# Altium PCB FDTI_USB_PCB.PcbDoc (part 2 of 2)
Units mil, origin at the board's own origin, x right, y up, seen from the top; angles counter-clockwise.
Board outline 5600 x 4000 mil, 4 copper layers (Top Layer, Plane(Gnd), Plane(PWR), Bottom Layer), stack 23.756 mil thick; 166 components, 158 nets, 411 pads, 530 vias.
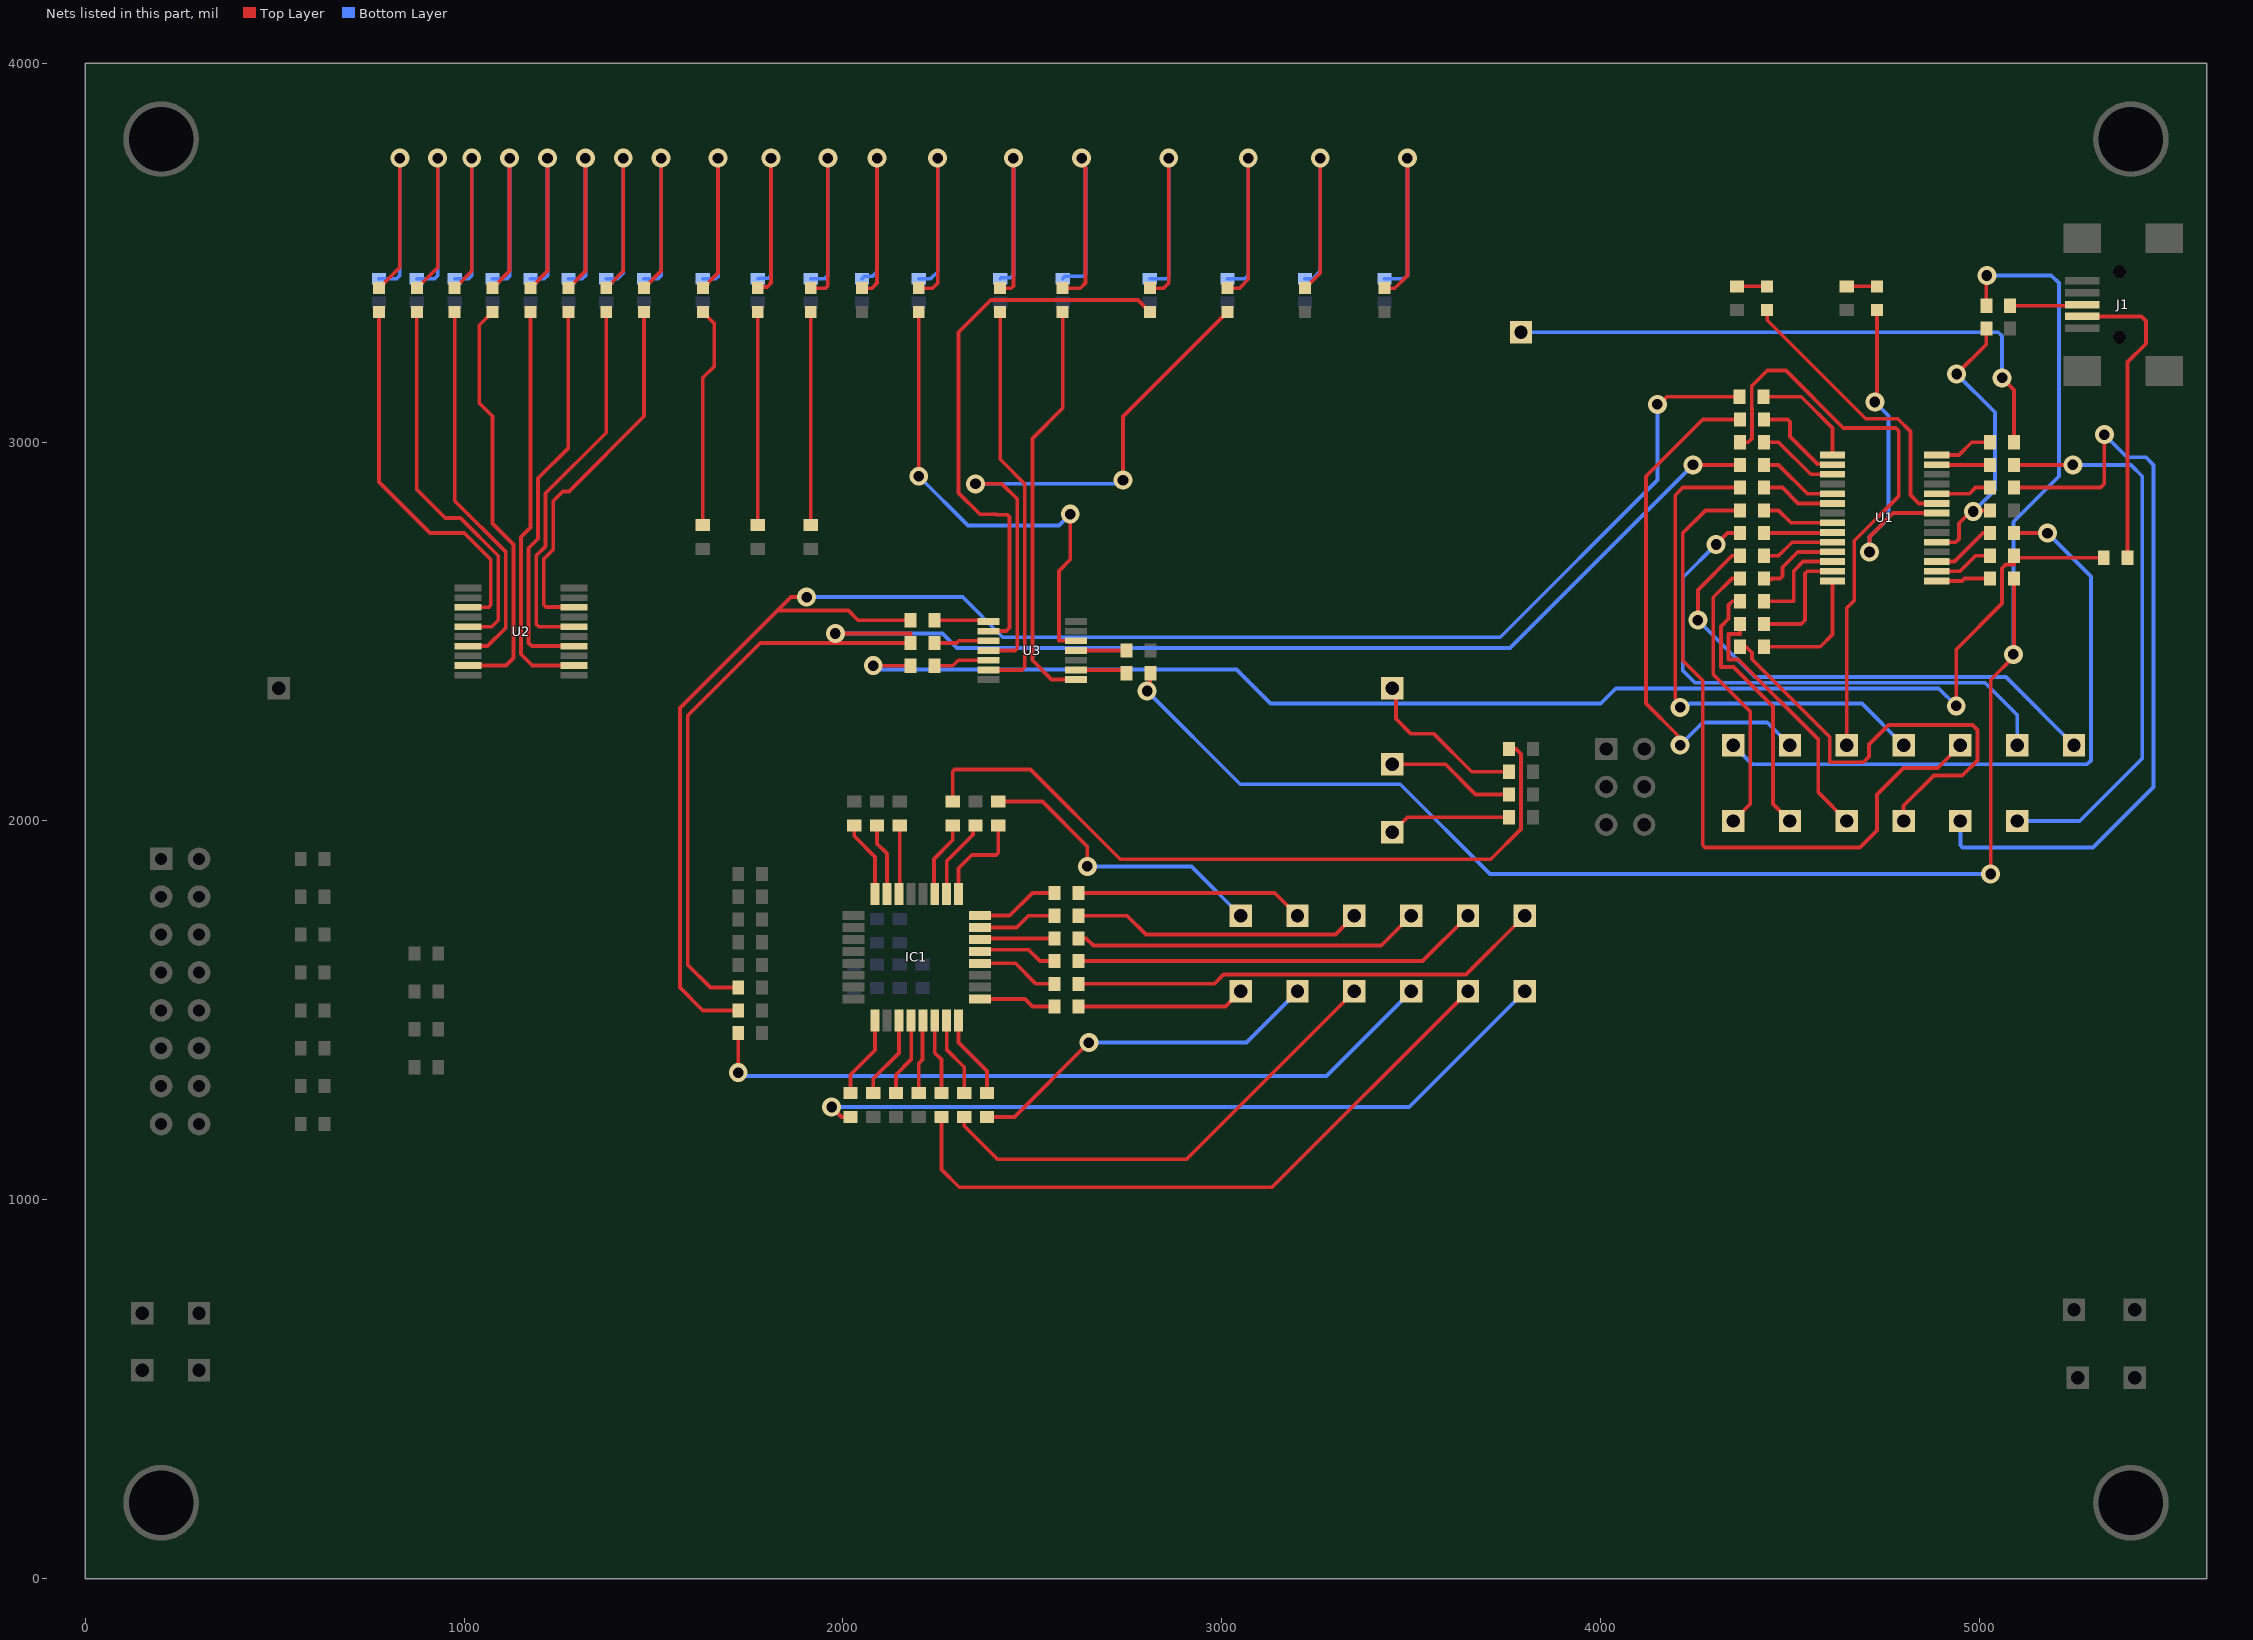
[diagram p4: the nets of this part, all layers, seen from the top]

## Via types
v1: diameter 50, hole 28, Top Layer to Bottom Layer, 530 vias

## Nets (pads, with @x,y where several pads share a name; then routed paths per layer and width w, separated by ;. In a path a pad name is that pad's centre, name@x,y a point inside that pad or via, vN(x,y) a via of type N, cw(c..) or ccw(c..) an arc to the next point about the centre after c; other vN are vias at no path point) (continued)
NetIC1_9: IC1.9 R40.2 | length 218.5
  Top Layer w10: R40.2@2020,1281.5 2020,1330 2084.76,1394.76 IC1.9@2084.76,1473.15
NetIC1_11: IC1.11 R43.1 | length 219.7
  Top Layer w10: R43.1@2080,1281.5 2080,1320 2147.76,1387.76 IC1.11@2147.76,1473.15
NetIC1_12: IC1.12 R42.1 | length 208.5
  Top Layer w10: R42.1@2140,1281.5 2140,1330 2180,1370 2180,1472.4 IC1.12@2179.25,1473.15
NetIC1_13: IC1.13 R41.1 | length 196.1
  Top Layer w10: R41.1@2200,1281.5 2200,1360 2210,1370 2210,1472.4 IC1.13@2210.75,1473.15
NetIC1_14: IC1.14 R39.1 | length 199
  Top Layer w10: IC1.14@2242.24,1473.15 2242.24,1387.76 2260,1370 R39.1@2260,1281.5
NetIC1_15: IC1.15 R37.1 | length 210.8
  Top Layer w10: IC1.15@2273.74,1473.15 2273.74,1396.26 2320,1350 R37.1@2320,1281.5
NetIC1_16: IC1.16 R35.1 | length 222.6
  Top Layer w10: IC1.16@2305.24,1473.15 2305.24,1414.76 2380,1340 R35.1@2380,1281.5
NetIC1_17: IC1.17 R33.1 | length 204.8
  Top Layer w10: IC1.17@2361.85,1529.76 2480.24,1529.76 2500,1510 R33.1@2558.5,1510
NetIC1_20: IC1.20 R32.1 | length 219.1
  Top Layer w10: IC1.20@2361.85,1624.25 2455.75,1624.25 2510,1570 R32.1@2558.5,1570
NetIC1_21: IC1.21 R30.1 | length 210.8
  Top Layer w10: IC1.21@2361.85,1655.75 2366.1,1660 2490,1660 2520,1630 R30.1@2558.5,1630
NetIC1_22: IC1.22 R28.1 | length 197.8
  Top Layer w10: IC1.22@2361.85,1687.24 2364.61,1690 R28.1@2558.5,1690
NetIC1_23: IC1.23 R26.1 | length 209.6
  Top Layer w10: IC1.23@2361.85,1718.74 2458.74,1718.74 2490,1750 R26.1@2558.5,1750
NetIC1_24: IC1.24 R24.1 | length 221.4
  Top Layer w10: IC1.24@2361.85,1750.24 2440.24,1750.24 2500,1810 R24.1@2558.5,1810
NetIC1_25: IC1.25 R22.1 | length 262.6
  Top Layer w10: IC1.25@2305.24,1806.85 2305.24,1875.24 2340,1910 2404.14,1910 2410,1915.86 R22.1@2410,1988.5
NetIC1_26: IC1.26 R20.1 | length 213.2
  Top Layer w10: IC1.26@2273.74,1806.85 2273.74,1893.74 2343.61,1963.61 2343.61,1982.12 R20.1@2350,1988.5
NetIC1_27: IC1.27 R18.1 | length 203.3
  Top Layer w10: IC1.27@2242.24,1806.85 2240,1809.09 2240,1900 2290,1950 R18.1@2290,1988.5
NetIC1_30: IC1.30 R17.2 | length 182.6
  Top Layer w10: IC1.30@2147.76,1806.85 2150,1809.09 R17.2@2150,1988.5
NetIC1_31: IC1.31 R19.2 | length 192.5
  Top Layer w10: R19.2@2090,1988.5 2090,1940 2116.26,1913.74 IC1.31@2116.26,1806.85
NetIC1_32: IC1.32 R21.2 | length 204.3
  Top Layer w10: R21.2@2030,1988.5 2030,1960 2084.76,1905.24 IC1.32@2084.76,1806.85
NetJ1_2: J1.2 R51.1 | length 813.4
  Top Layer w10: J1.2@5271.57,3331.89 5428.11,3331.89 5440,3320 5440,3260 5391.5,3211.5 R51.1@5391.5,2700
NetJ1_3: J1.3 R53.1 | length 191.5
  Top Layer w10: R53.1@5081.5,3360 5268.19,3360 J1.3@5271.57,3363.39
NetLED1_1: LED1.1 U1.23 | length 773.1
  Top Layer w10: LED1.1@4440,3348.5 4440,3322 4700,3062 4784.55,3062 4818,3028.55 4818,2860.39 4840,2838.39 U1.23@4887.8,2838.39
NetLED1_2: LED1.2 R44.1 | length 80
  Top Layer w10: R44.1@4360,3411.5 LED1.2@4440,3411.5
NetLED2_1: LED2.1 U1.22 | length 920.4
  Top Layer w10: v1(4710,2710) 4710,2750 4772.8,2812.8 U1.22@4887.8,2812.8 ; v1(4724,3106) 4730,3112 LED2.1@4730,3348.5
  Bottom Layer w10: v1(4710,2710) 4710,2750 4760,2800 4760,3070 v1(4724,3106)
NetLED2_2: LED2.2 R45.1 | length 80
  Top Layer w10: R45.1@4650,3411.5 LED2.2@4730,3411.5
NetLED3_1: LED3.1 R88.2 | length 586.9
  Top Layer w10: R88.2@1630,2781.5 1630,3170 1660,3200 1660,3313.5 LED3.1@1630,3343.5
NetLED3_2: LED3.2 R68.1 | length 715.1
  Top Layer w10: LED3.2@1630,3406.5 1670,3446.5 v1(1670,3750)
  Bottom Layer w10: R68.1@1630,3431.5 1664.14,3431.5 1670,3437.35 v1(1670,3750)
NetLED4_1: LED4.1 R90.2 | length 562
  Top Layer w10: R90.2@1775,2781.5 LED4.1@1775,3343.5
NetLED4_2: LED4.2 R69.2 | length 719.1
  Top Layer w10: LED4.2@1775,3406.5 1778.39,3409.89 1799.89,3409.89 1810,3420 v1(1810,3750)
  Bottom Layer w10: R69.2@1775,3431.5 1776.35,3432.84 1802.84,3432.84 1810,3440 v1(1810,3750)
NetLED5_1: LED5.1 R92.2 | length 562
  Top Layer w10: R92.2@1915,2781.5 1915,3048.5 LED5.1@1915,3343.5
NetLED5_2: LED5.2 R70.1 | length 743.6
  Top Layer w10: LED5.2@1915,3406.5 1954.14,3406.5 1960,3412.35 v1(1960,3750)
  Bottom Layer w10: R70.1@1915,3431.5 1951.5,3431.5 1960,3440 v1(1960,3750)
NetLED6_1: LED6.1 U3.2 | length 1490.4
  Top Layer w10: U3.2@2384.33,2501.18 2431.18,2501.18 2440,2510 2440,2798.61 ; 2436.91,2805.83 cw(c2430,2798.61) 2437.25,2805.49 ; 2440,2798.66 cw(c2430,2798.61) 2440,2798.61 ; LED6.1@2810,3343.5 2778.5,3375 2390,3375 2305,3290 2305,2865.98 2361,2809.98 2380.61,2809.98 ccw(c2459.18,4753.94) 2430.17,2808.6 cw(c2430,2798.61) 2430.33,2808.6 2434.14,2808.48 2437.25,2805.49 ; 2437.25,2805.49 2439.98,2802.65 2440,2798.61
NetLED6_2: LED6.2 R71.1 | length 751.5
  Top Layer w10: LED6.2@2810,3406.5 2846.5,3406.5 2860,3420 v1(2860,3750)
  Bottom Layer w10: R71.1@2810,3431.5 2855.64,3431.5 2860,3435.86 v1(2860,3750)
NetLED7_1: LED7.1 U3.4 | length 1535.7
  Top Layer w10: v1(2350,2890) 2420,2890 2460,2850 2460,2455.86 2454.14,2450 U3.4@2384.33,2450 ; v1(2739.18,2900) 2739.18,3067.68 LED7.1@3015,3343.5
  Bottom Layer w10: v1(2350,2890) v1@2729.18,2890
NetLED7_2: LED7.2 R72.1 | length 763.3
  Top Layer w10: LED7.2@3015,3406.5 3046.5,3406.5 3070,3430 v1(3070,3750)
  Bottom Layer w10: R72.1@3015,3431.5 3061.5,3431.5 3070,3440 v1@3070,3760
NetLED8_1: LED8.1 U3.6 | length 1063.2
  Top Layer w10: U3.6@2384.33,2398.82 2472.96,2398.82 2480,2405.86 2480,2890 2415,2955 LED8.1@2415,3343.5
NetLED8_2: LED8.2 R73.1 | length 732.7
  Top Layer w10: LED8.2@2415,3406.5 2444.14,3406.5 2450,3412.35 v1(2450,3750)
  Bottom Layer w10: R73.1@2415,3431.5 2417.84,3434.34 2442.84,3434.34 2450,3441.5 v1@2450,3760
NetLED9_1: LED9.1 U3.8 | length 1089.3
  Top Layer w10: LED9.1@2580,3343.5 2580,3090 2500,3010 2500,2424.08 2550.85,2373.23 U3.8@2615.67,2373.23
NetLED9_2: LED9.2 R74.1 | length 775.2
  Top Layer w10: LED9.2@2580,3406.5 2626.5,3406.5 2640,3420 2640,3724.14 2637.65,3726.49 2637.65,3742.35 v1(2630,3750)
  Bottom Layer w10: R74.1@2580,3431.5 2586.35,3437.84 2634.14,3437.84 2640,3443.7 2640,3724.14 2637.65,3726.49 2637.65,3742.35 v1(2630,3750)
NetLED10_2: LED10.2 R75.1 | length 723.3
  Top Layer w10: LED10.2@2050,3406.5 2076.5,3406.5 2090,3420 v1(2090,3750)
  Bottom Layer w10: R75.1@2050,3431.5 2056.35,3437.84 2077.84,3437.84 2090,3450 v1(2090,3750)
NetLED11_1: LED11.1 U2.18 | length 974.8
  Top Layer w10: U2.18@1289.76,2563.98 1288.93,2564.81 1215.86,2564.81 1210,2570.67 1210,2691.72 1235,2716.72 1235,2845 1260,2870 1276.5,2870 1475,3068.5 LED11.1@1475,3343.5
NetLED11_2: LED11.2 R79.1 | length 720.7
  Top Layer w10: LED11.2@1475,3406.5 1520,3451.5 v1(1520,3750)
  Bottom Layer w10: R79.1@1475,3431.5 1511.5,3431.5 1520,3440 v1(1520,3750)
NetLED12_1: LED12.1 U2.16 | length 1002.9
  Top Layer w10: U2.16@1289.76,2512.8 1197.2,2512.8 1190,2520 1190,2700 1215,2725 1215,2865 1375,3025 LED12.1@1375,3343.5
NetLED12_2: LED12.2 R80.1 | length 717.2
  Top Layer w10: LED12.2@1375,3406.5 1420,3451.5 v1(1420,3750)
  Bottom Layer w10: R80.1@1375,3431.5 1405.64,3431.5 1420,3445.86 v1(1420,3750)
NetLED13_1: LED13.1 U2.14 | length 1040.2
  Top Layer w10: LED13.1@1275,3343.5 1275,3068.5 1275,2985 1195,2905 1195,2745 1170,2720 1170,2470 1178.39,2461.61 U2.14@1289.76,2461.61
NetLED13_2: LED13.2 R81.1 | length 720.7
  Top Layer w10: LED13.2@1275,3406.5 1320,3451.5 v1(1320,3750)
  Bottom Layer w10: R81.1@1275,3431.5 1311.5,3431.5 1320,3440 v1(1320,3750)
NetLED14_1: LED14.1 U2.12 | length 1065.9
  Top Layer w10: LED14.1@1175,3343.5 1175,3068.5 1175,2775 1150,2750 1150,2440 1179.57,2410.43 U2.12@1289.76,2410.43
NetLED14_2: LED14.2 R82.1 | length 720.7
  Top Layer w10: LED14.2@1175,3406.5 1220,3451.5 v1(1220,3750)
  Bottom Layer w10: R82.1@1175,3431.5 1211.5,3431.5 1220,3440 v1(1220,3750)
NetLED15_1: LED15.1 U2.9 | length 1093.1
  Top Layer w10: U2.9@1010.24,2410.43 1110.43,2410.43 1130,2430 1130,2730 1075,2785 1075,3068.5 1040,3103.5 1040,3308.5 LED15.1@1075,3343.5
NetLED15_2: LED15.2 R83.1 | length 721.4
  Top Layer w10: LED15.2@1075,3406.5 1120,3451.5 v1(1120,3750)
  Bottom Layer w10: R83.1@1075,3431.5 1112.8,3431.5 1120,3438.7 v1(1120,3750)
NetLED16_1: LED16.1 U2.7 | length 1009.2
  Top Layer w10: LED16.1@975,3343.5 975,3068.5 975,2845 1110,2710 1110,2510 1061.61,2461.61 U2.7@1010.24,2461.61
NetLED16_2: LED16.2 R84.1 | length 720.7
  Top Layer w10: LED16.2@975,3406.5 1020,3451.5 v1(1020,3750)
  Bottom Layer w10: R84.1@975,3431.5 1011.5,3431.5 1020,3440 v1(1020,3750)
NetLED17_1: LED17.1 U2.5 | length 1012.9
  Top Layer w10: LED17.1@875,3343.5 875,3068.5 875,2875 950,2800 990,2800 1090,2700 1090,2530 1072.8,2512.8 U2.5@1010.24,2512.8
NetLED17_2: LED17.2 R85.1 | length 734.8
  Top Layer w10: LED17.2@875,3406.5 930,3461.5 v1(930,3750)
  Bottom Layer w10: R85.1@875,3431.5 921.5,3431.5 930,3440 v1(930,3750)
NetLED18_1: LED18.1 U2.3 | length 1010.7
  Top Layer w10: LED18.1@775,3343.5 775,3068.5 775,2895 910,2760 1000,2760 1070,2690 1070,2570 1063.98,2563.98 U2.3@1010.24,2563.98
NetLED18_2: LED18.2 R86.1 | length 734.8
  Top Layer w10: LED18.2@775,3406.5 830,3461.5 v1(830,3750)
  Bottom Layer w10: R86.1@775,3431.5 821.5,3431.5 830,3440 v1(830,3750)
NetLED19_1: LED19.1 U3.12 | length 1291.9
  Top Layer w10: v1(2200,2910) LED19.1@2200,3343.5 ; v1(2600,2810) 2600,2690 2570.27,2660.27 2570.27,2475.59 U3.12@2615.67,2475.59
  Bottom Layer w10: v1(2200,2910) 2330,2780 2570,2780 v1(2600,2810)
NetLED19_2: LED19.2 R76.1 | length 746.8
  Top Layer w10: LED19.2@2200,3406.5 2236.5,3406.5 2250,3420 v1(2250,3750)
  Bottom Layer w10: R76.1@2200,3431.5 2231.5,3431.5 2250,3450 v1@2250,3753.58
NetLED20_2: LED20.2 R77.1 | length 777.4
  Top Layer w10: LED20.2@3430,3406.5 3456.5,3406.5 3490,3440 v1@3490,3760
  Bottom Layer w10: R77.1@3430,3431.5 3481.5,3431.5 3490,3440 v1@3490,3760
  other v1: 3490,3750
NetLED21_2: LED21.2 R78.2 | length 706.9
  Top Layer w10: LED21.2@3220,3406.5 3260,3446.5 v1(3260,3750)
  Bottom Layer w10: R78.2@3220,3431.5 3240,3431.5 3260,3451.5 v1(3260,3750)
NetR2_1: R2.1 TP1.1 | length 440.6
  Top Layer w10: TP1.1@3450,2350 3460,2340 3460,2270 3500,2230 3560,2230 3660,2130 R2.1@3758.5,2130
NetR3_2: R3.2 TP2.1 | length 341.6
  Top Layer w10: TP2.1@3450,2150 3590,2150 3670,2070 R3.2@3758.5,2070
NetR5_1: R5.1 TP3.1 | length 325.1
  Top Layer w10: TP3.1@3450,1970 3490,2010 R5.1@3758.5,2010
NetR22_2: R22.2 TP5.1 | length 795.9
  Top Layer w10: R22.2@2410,2051.5 2526.5,2051.5 2645,1933 v1(2645,1880)
  Bottom Layer w10: v1(2645,1880) 2920,1880 TP5.1@3050,1750
NetR24_2: R24.2 TP6.1 | length 603.4
  Top Layer w10: R24.2@2621.5,1810 3140,1810 TP6.1@3200,1750
NetR26_2: R26.2 TP7.1 | length 769.9
  Top Layer w10: R26.2@2621.5,1750 2750,1750 2800,1700 3300,1700 TP7.1@3350,1750
NetR28_2: R28.2 TP8.1 | length 919.1
  Top Layer w10: R28.2@2621.5,1690 2642,1690 2661,1671 3421,1671 TP8.1@3500,1750
NetR30_2: R30.2 TP9.1 | length 1078.2
  Top Layer w10: R30.2@2621.5,1630 3530,1630 TP9.1@3650,1750
NetR32_2: R32.2 TP10.1 | length 1253.1
  Top Layer w10: R32.2@2621.5,1570 2980,1570 3005,1595 3645,1595 TP10.1@3800,1750
NetR33_2: R33.2 TP11.1 | length 445.1
  Top Layer w10: R33.2@2621.5,1510 3010,1510 TP11.1@3050,1550
NetR35_2: R35.2 TP12.1 | length 957.3
  Top Layer w10: R35.2@2380,1218.5 2452.5,1218.5 v1(2649,1415)
  Bottom Layer w10: v1(2649,1415) 3065,1415 TP12.1@3200,1550
NetR37_2: R37.2 TP13.1 | length 1273.5
  Top Layer w10: R37.2@2320,1218.5 2320,1195 2408,1107 2907,1107 TP13.1@3350,1550
NetR38_1: R38.1 TP14.1 | length 1977.3
  Top Layer w10: v1(1723.5,1335.5) R38.1@1723.5,1440
  Bottom Layer w10: v1(1723.5,1335.5) 1732.5,1326.5 3276.5,1326.5 TP14.1@3500,1550
NetR39_2: R39.2 TP15.1 | length 1762.1
  Top Layer w10: R39.2@2260,1218.5 2260,1080 2307,1033 3133,1033 TP15.1@3650,1550
NetR40_1: R40.1 TP16.1 | length 2017.3
  Top Layer w10: v1(1970,1245) 1996.5,1218.5 R40.1@2020,1218.5
  Bottom Layer w10: v1(1970,1245) 3495,1245 TP16.1@3800,1550
NetR46_1: R46.1 U1.17 | length 171.8
  Top Layer w10: U1.17@4887.8,2684.84 4934.84,2684.84 5010,2760 R46.1@5028.5,2760
NetR46_2: R46.2 TP17.1 | length 1706
  Top Layer w10: R46.2@5091.5,2760 v1(5180,2760)
  Bottom Layer w10: TP17.1@4350,2200 4400,2150 5285,2150 5295,2160 5295,2645 v1(5180,2760)
NetR47_2: R47.2 U1.1 | length 287.7
  Top Layer w10: R47.2@4430,3120 4530,3120 4612.2,3037.8 U1.1@4612.2,2966.34
NetR48_1: R48.1 U1.2 | length 253
  Top Layer w10: R48.1@4431.5,3060 4494.14,3060 4500,3054.14 4500,3015.01 4572.53,2942.48 4610.47,2942.48 U1.2@4612.2,2940.75
NetR48_2: R48.2 TP18.1 | length 1397.7
  Top Layer w10: v1(4210,2200) 4202.35,2207.65 4202.35,2227.65 4120,2310 4120,2910.16 4269.84,3060 R48.2@4368.5,3060
  Bottom Layer w10: v1(4210,2200) 4270,2260 4440,2260 TP18.1@4500,2200
NetR49_2: R49.2 U1.5 | length 212.2
  Top Layer w10: R49.2@4431.5,2940 4470,2940 4546.02,2863.98 U1.5@4612.2,2863.98
NetR50_1: R50.1 U1.3 | length 215.9
  Top Layer w10: R50.1@4431.5,3000 4470,3000 4554.84,2915.16 U1.3@4612.2,2915.16
NetR50_2: R50.2 TP19.1 | length 1531.6
  Top Layer w10: R50.2@4368.5,3000 4390,3000 4400,3010 4400,3089 4399,3090 4399,3148 4440,3189 4489.29,3189 4640.66,3037.63 4779.37,3037.63 4787,3030 4787,2857 4670,2740 4670,2582 4650,2562 TP19.1@4650,2200
NetR52_1: R52.1 U1.6 | length 197.9
  Top Layer w10: R52.1@4431.5,2880 4480,2880 4521.61,2838.39 U1.6@4612.2,2838.39
NetR52_2: R52.2 TP20.1 | length 1384.9
  Top Layer w10: v1(4210,2300) 4210,2310.82 4197,2323.82 4197,2860 4217,2880 R52.2@4368.5,2880
  Bottom Layer w10: v1(4210,2300) 4217.65,2307.65 4233.51,2307.65 4235.86,2310 4690,2310 TP20.1@4800,2200
NetR54_1: R54.1 R67.2 U1.19 | length 785.1
  Top Layer w10: U1.19@4887.8,2736.02 4937.74,2736.02 4946.02,2744.31 4946.02,2786.02 4980,2820 v1@4987,2820 ; v1(4940,3180) 5018.5,3258.5 R54.1@5018.5,3300 ; v1(4984,2817) v1@4987,2820 ; R67.2@5028.5,2820 v1@4987,2820
  Bottom Layer w10: v1(4940,3180) 5041,3079 5041,2874 v1(4984,2817)
NetR55_1: R55.1 U1.8 | length 194.3
  Top Layer w10: R55.1@4431.5,2820 4470,2820 4502.8,2787.2 U1.8@4612.2,2787.2
NetR55_2: R55.2 TP21.1 | length 1872.4
  Top Layer w10: R55.2@4368.5,2820 4277,2820 4217,2760 4217,2423.75 4270,2370.75 4270,1935.86 4275.86,1930 4685,1930 4730,1975 4730,2070 4800,2140 4890,2140 TP21.1@4950,2200
NetR56_1: R56.1 U1.9 | length 181.4
  Top Layer w10: R56.1@4431.5,2760 4610.59,2760 U1.9@4612.2,2761.61
NetR56_2: R56.2 TP22.1 | length 1456.8
  Top Layer w10: v1(4305,2730) 4335,2760 R56.2@4368.5,2760
  Bottom Layer w10: v1(4305,2730) 4217,2642 4217,2397 4249,2365 5015,2365 5100,2280 TP22.1@5100,2200
NetR57_2: R57.2 U1.16 | length 157.6
  Top Layer w10: U1.16@4887.8,2659.25 4949.25,2659.25 4990,2700 R57.2@5028.5,2700
NetR58_1: R58.1 U1.10 | length 195.6
  Top Layer w10: R58.1@4431.5,2700 4470,2700 4506.02,2736.02 U1.10@4612.2,2736.02
NetR58_2: R58.2 TP23.1 | length 1358.5
  Top Layer w10: v1(4257,2530) 4257,2610 4347,2700 R58.2@4368.5,2700
  Bottom Layer w10: v1(4257,2530) 4407,2380 5070,2380 TP23.1@5250,2200
NetR59_2: R59.2 U1.15 | length 143.3
  Top Layer w10: U1.15@4887.8,2633.66 4954,2633.66 4960.34,2640 R59.2@5028.5,2640
NetR60_1: R60.1 U1.11 | length 230
  Top Layer w10: R60.1@4431.5,2640 4431.5,2637 4451.5,2637 4451.5,2640 4474.14,2640 4480,2645.86 4480,2670 4520.43,2710.43 U1.11@4612.2,2710.43
NetR60_2: R60.2 TP24.1 | length 740.8
  Top Layer w10: TP24.1@4350,2000 4395,2045 4395,2289.05 4297.75,2386.3 4297.75,2590.75 4347,2640 R60.2@4368.5,2640
NetR61_1: R61.1 U1.12 | length 271
  Top Layer w10: R61.1@4431.5,2580 4510,2580 4510,2660 4534.84,2684.84 U1.12@4612.2,2684.84
NetR61_2: R61.2 TP25.1 | length 708.1
  Top Layer w10: R61.2@4368.5,2580 4347.75,2580 4337.75,2570 4337.75,2533.7 4317.75,2513.7 4317.75,2406.3 4350.96,2406.3 4455,2302.26 4455,2045 TP25.1@4500,2000
NetR62_1: R62.1 U1.13 | length 310.7
  Top Layer w10: R62.1@4431.5,2520 4530,2520 4540,2530 4540,2653.39 4545.86,2659.25 U1.13@4612.2,2659.25
NetR62_2: R62.2 TP26.1 | length 695.3
  Top Layer w10: R62.2@4368.5,2520 4368.5,2493.7 4337.75,2493.7 4337.75,2426.3 4363.7,2426.3 4575,2215 4575,2075 TP26.1@4650,2000
NetR63_1: R63.1 U1.14 | length 335.5
  Top Layer w10: R63.1@4431.5,2460 4580,2460 4612.2,2492.2 U1.14@4612.2,2633.66
NetR63_2: R63.2 TP27.1 | length 1231.5
  Top Layer w10: R63.2@4368.5,2460 4384,2460 4400,2444 4400,2427 4605,2222 4605,2155 4694,2155 4709,2170 4709,2202 4760,2253 4982,2253 4995,2240 4995,2160 4955,2120 4880,2120 4800,2040 TP27.1@4800,2000
NetR64_1: R64.1 U1.24 | length 147.3
  Top Layer w10: U1.24@4887.8,2863.98 4973.98,2863.98 4990,2880 R64.1@5028.5,2880
NetR64_2: R64.2 TP28.1 | length 2042.8
  Top Layer w10: TP28.1@4940,1990 TP28.1@4950,2000 ; R64.2@5091.5,2880 5320,2880 5330,2890 v1(5330,3020)
  Bottom Layer w10: TP28.1@4950,2000 4950,1935.86 4955.86,1930 5300,1930 5460,2090 5460,2940 5440,2960 5390,2960 v1(5330,3020)
NetR65_1: R65.1 U1.27 | length 141
  Top Layer w10: U1.27@4887.8,2940.75 4888.54,2940 R65.1@5028.5,2940
NetR65_2: R65.2 TP29.1 | length 1494.3
  Top Layer w10: R65.2@5091.5,2940 v1(5247,2940)
  Bottom Layer w10: TP29.1@5100,2000 5265,2000 5430,2165 5430,2910 5400,2940 v1(5247,2940)
NetR66_1: R66.1 U1.28 | length 154.7
  Top Layer w10: U1.28@4887.8,2966.34 4946.34,2966.34 4980,3000 R66.1@5028.5,3000
NetR66_2: R66.2 TP30.1 | length 1567.2
  Top Layer w10: v1(5060,3170) 5060,3169.35 5091.5,3137.86 R66.2@5091.5,3000
  Bottom Layer w10: TP30.1@3790,3290 5050,3290 5060,3280 v1(5060,3170)
NetR87_2: R87.2 U3.1 | length 144.2
  Top Layer w10: R87.2@2241.5,2530 2381.1,2530 U3.1@2384.33,2526.77
NetR89_2: R89.2 U3.3 | length 145.1
  Top Layer w10: R89.2@2241.5,2470 2300,2470 2305.59,2475.59 U3.3@2384.33,2475.59
NetR91_2: R91.2 U3.5 | length 148.8
  Top Layer w10: R91.2@2241.5,2410 2290,2410 2304.41,2424.41 U3.5@2384.33,2424.41
NetR93_2: R93.2 U3.9 | length 136.5
  Top Layer w10: U3.9@2615.67,2398.82 2739.69,2398.82 R93.2@2748.5,2390
NetR94_2: R94.2 U3.11 | length 132.8
  Top Layer w10: U3.11@2615.67,2450 R94.2@2748.5,2450
RXD: R36.1 R47.1 R87.1 | length 4620.5
  Top Layer w10: R36.1@1723.5,1500 1630,1500 1570,1560 1570,2298 1827.36,2555.36 ; v1(1904,2591) 1863,2591 1827.36,2555.36 ; R87.1@2178.5,2530 2039.99,2530 2014.63,2555.36 1827.36,2555.36 ; v1(4150,3100) 4155.86,3100 4175.86,3120 R47.1@4367.01,3120
  Bottom Layer w10: v1(1904,2591) 2316,2591 2422,2485 3735,2485 4150,2900 v1(4150,3100)
TXD: R34.1 R49.1 R89.1 | length 4312.5
  Top Layer w10: R34.1@1723.5,1560 1650,1560 1590,1620 1590,2278.5 1781.5,2470 R89.1@2178.5,2470 2178.5,2495 v1(1980,2495) ; v1(4244,2940) R49.1@4368.5,2940
  Bottom Layer w10: v1(1980,2495) 2263,2495 2301,2457 3761,2457 v1(4244,2940)
UPDI: R1.1 R18.2 | length 1948
  Top Layer w10: R18.2@2290,2051.5 2290,2131.41 2294.59,2136 2495,2136 2732,1899 3710,1899 3790,1979 3790,2177 3777,2190 R1.1@3758.5,2190
USBDM: R51.2 R57.1 R91.1 | length 3750.9
  Top Layer w10: v1(2080,2410) R91.1@2178.5,2410 ; v1(4939,2304) 4939,2453 5060,2574 5060,2667 5070,2677 5091.5,2677 5091.5,2695 R57.1@5091.5,2700 5096.5,2695 R51.2@5328.5,2695
  Bottom Layer w10: v1(2080,2410) 2080,2400 3039,2400 3128.53,2310.47 4000.59,2310.47 4040.12,2350 4893,2350 v1(4939,2304)
USBDP: R53.2 R59.1 R93.1 | length 4586.2
  Top Layer w10: v1(2803,2343) 2811.5,2351.5 R93.1@2811.5,2390 ; R53.2@5018.5,3360 5018.5,3438.5 v1(5020,3440) ; v1(5030,1860) 5030,2373 v1@5091.5,2434.5 ; v1@5091.5,2440 R59.1@5091.5,2640
  Bottom Layer w10: v1(2803,2343) 3049,2097 3471,2097 3708,1860 v1(5030,1860) ; v1(5020,3440) 5190,3440 5210,3420 5210,2910 5090,2790 v1(5090,2440)
pads on no net: J1.10 J1.11
copper on no net: | length 5600
  Top Layer w10: 0,4000 5600,4000
  other v1: 500,100 600,100 700,100 800,100 900,100 1000,100 1100,100 1200,100 1300,100 1400,100 1500,100 1600,100 1700,100 1800,100 1900,100 2000,100 2100,100 2200,100 2300,100 2400,100 2500,100 2600,100 2700,100 2800,100 2900,100 3000,100 3100,100 3200,100 3300,100 3400,100 3500,100 3600,100 3700,100 3800,100 3900,100 4000,100 4100,100 4200,100 4300,100 4400,100 4500,100 4600,100 4700,100 4800,100 4900,100 5000,100 5100,100 500,200 600,200 700,200 800,200 900,200 1000,200 1100,200 1200,200 1300,200 1400,200 1500,200 1600,200 1700,200 1800,200 1900,200 2000,200 2100,200 2200,200 2300,200 2400,200 2500,200 2600,200 2700,200 2800,200 2900,200 3000,200 3100,200 3200,200 3300,200 3400,200 3500,200 3600,200 3700,200 3800,200 3900,200 4000,200 4100,200 4200,200 4300,200 4400,200 4500,200 4600,200 4700,200 4800,200 4900,200 5000,200 5100,200 500,300 600,300 700,300 800,300 900,300 1000,300 1100,300 1200,300 1300,300 1400,300 1500,300 1600,300 1700,300 1800,300 1900,300 2000,300 2100,300 2200,300 2300,300 2400,300 2500,300 2600,300 2700,300 2800,300 2900,300 3000,300 3100,300 3200,300 3300,300 3400,300 3500,300 3600,300 3700,300 3800,300 3900,300 4000,300 4100,300 4200,300 4300,300 4400,300 4500,300 4600,300 4700,300 4800,300 4900,300 5000,300 5100,300 500,400 600,400 700,400 800,400 900,400 1000,400 1100,400 1200,400 1300,400 1400,400 1500,400 1600,400 1700,400 1800,400 1900,400 2000,400 2100,400 2200,400 2300,400 2400,400 2500,400 2600,400 2700,400 2800,400 2900,400 3000,400 3100,400 3200,400 3300,400 3400,400 3500,400 3600,400 3700,400 3800,400 3900,400 4000,400 4100,400 4200,400 4300,400 4400,400 4500,400 4600,400 4700,400 4800,400 4900,400 5000,400 5100,400 500,500 600,500 700,500 800,500 900,500 1000,500 1100,500 1200,500 1300,500 1400,500 1500,500 1600,500 1700,500 1800,500 1900,500 2000,500 2100,500 2200,500 2300,500 2400,500 2500,500 2600,500 2700,500 2800,500 2900,500 3000,500 3100,500 3200,500 3300,500 3400,500 3500,500 3600,500 3700,500 3800,500 3900,500 4000,500 4100,500 4200,500 4300,500 4400,500 4500,500 4600,500 4700,500 4800,500 4900,500 5000,500 5100,500 500,600 600,600 700,600 800,600 900,600 1000,600 1100,600 1200,600 1300,600 1400,600 1500,600 1600,600 1700,600 1800,600 1900,600 2000,600 2100,600 2200,600 2300,600 2400,600 2500,600 2600,600 2700,600 2800,600 2900,600 3000,600 3100,600 3200,600 3300,600 3400,600 3500,600 3600,600 3700,600 3800,600 3900,600 4000,600 4100,600 4200,600 4300,600 4400,600 4500,600 4600,600 4700,600 4800,600 4900,600 5000,600 5100,600 500,700 600,700 700,700 800,700 900,700 1000,700 1100,700 1200,700 1300,700 1400,700 1500,700 1600,700 1700,700 1800,700 1900,700 2000,700 2100,700 2200,700 2300,700 2400,700 2500,700 2600,700 2700,700 2800,700 2900,700 3000,700 3100,700 3200,700 3300,700 3400,700 3500,700 3600,700 3700,700 3800,700 3900,700 4000,700 4100,700 4200,700 4300,700 4400,700 4500,700 4600,700 4700,700 4800,700 4900,700 5000,700 5100,700 500,800 600,800 700,800 800,800 900,800 1000,800 1100,800 1200,800 1300,800 1400,800 1500,800 1600,800 1700,800 1800,800 1900,800 2000,800 2100,800 2200,800 2300,800 2400,800 2500,800 2600,800 2700,800 2800,800 2900,800 3000,800 3100,800 3200,800 3300,800 3400,800 3500,800 3600,800 3700,800 3800,800 3900,800 4000,800 4100,800 4200,800 4300,800 4400,800 4500,800 4600,800 4700,800 4800,800 4900,800 5000,800 5100,800 500,900 700,900 800,900 900,900 1000,900 1100,900 1200,900 1300,900 1400,900 1500,900 1600,900 1700,900 1800,900 1900,900 2000,900 2100,900 2200,900 2300,900 2400,900 2500,900 2600,900 2700,900 2800,900 2900,900 3000,900 3100,900 3200,900 3300,900 3400,900 3500,900 3600,900 3700,900 3800,900 3900,900 4000,900 4100,900 4200,900 4300,900 4400,900 4500,900 4600,900 4700,900 4800,900 4900,900 5000,900 5100,900

## Polygon pours and split planes (outlines as drawn)
no net on Bottom Layer "NONET_L04_P000" (solid, pour order 0): 5600,0 0,0 0,4000 5600,4000 0,4000 5600,4000
no net on Top Layer "NONET_L01_P001" (solid, pour order 1): 0,4000 5600,4000 5600,0 0,0
+5 on Plane(PWR) (split plane): 5579.9,20.1 20.1,20.1 20.1,3979.9 5579.9,3979.9
GND on Plane(Gnd) (split plane): 5579.9,20.1 20.1,20.1 20.1,3979.9 5579.9,3979.9

## Silkscreen, mask and mechanical layers (free items; w line width, h text height)
Top Overlay:
  lines w10: 717,3480 1527,3480 1527,3580 717,3580 717,3480 ; 717.5,3595 2292.5,3595 2292.5,3695 717.5,3695 717.5,3595 ; 1540,3480 2290,3480 2290,3580 1540,3580 1540,3480 ; 2310,3480 2710,3480 2710,3580 2310,3580 2310,3480 ; 2310,3595 2710,3595 2710,3695 2310,3695 2310,3595 ; 2727,3480 3127,3480 3127,3580 2727,3580 2727,3480 ; 2727,3595 3127,3595 3127,3695 2727,3695 2727,3595 ; 3145,3480 3545,3480 3545,3580 3145,3580 3145,3480 ; 3145,3595 3545,3595 3545,3695 3145,3695 3145,3595 ; 4295,3480 4795,3480 4795,3580 4295,3580 4295,3480 ; 4295,3595 4795,3595 4795,3695 4295,3695 4295,3595
  text "P/N FTDI-32958" at 4610,3860 h40
  text "ABS Data Systems, Inc, (c) Copyright 2025" at 1410,3829.99 h60
  text "Versio 1.1" at 4600.04,3789.96 h60
  text "CPU Bus and Control" at 1190,3630 h40
  text "FTDI" at 4470,3630 h40
  text "USB" at 2440,3620 h40
  text "Serial" at 2810,3620 h40
  text "Power" at 3240,3620 h40
  text "3.3V" at 3185,3511.5 h40
  text "5V" at 3410,3511.5 h40
  text "CBUS0" at 4335,3511.5 h40
  text "D7" at 750,3510 h40
  text "D6" at 846.9,3510 h40
  text "D5" at 943.81,3510 h40
  text "D4" at 1040.71,3510 h40
  text "D3" at 1137.62,3510 h40
  text "D2" at 1234.52,3510 h40
  text "D1" at 1331.42,3510 h40
  text "D0" at 1415,3510 h40
  text "Int" at 1590,3510 h40
  text "Rst" at 1730,3510 h40
  text "CS" at 1880,3510 h40
  text "RD" at 2020,3510 h40
  text "WR" at 2170,3510 h40
  text "DM" at 2380,3510 h40
  text "DP" at 2550,3510 h40
  text "RXD" at 2770,3510 h40
  text "TXD" at 2960,3510 h40
  text "CBUS1" at 4600,3510 h40
Mechanical 1:
  the board outline again, w10

## Text inside footprints (layer, text, board x,y; h text height)
H1: Top Overlay "1" at 3995,2270 h40 r270; Top Overlay "2" at 4095,2290 h40 r270; Top Overlay "5" at 3995,1920 h40 r270; Top Overlay "6" at 4095,1920 h40 r270
TP31: Top Overlay "+5.0v" at 5190,790 h30
TP32: Top Overlay "Gnd" at 250,450 h30
TP33: Top Overlay "+5.0v" at 240,770 h30
TP34: Top Overlay "Gnd" at 100,450 h30
TP35: Top Overlay "+5.0v" at 5350,790 h30
TP36: Top Overlay "Gnd" at 5370,420 h30
TP37: Top Overlay "+5.0v" at 90,770 h30
TP38: Top Overlay "Gnd" at 5220,420 h30